# Altium PCB sband.PcbDoc (part 1 of 2)
Units mil, origin at the board's own origin, x right, y up, seen from the top; angles counter-clockwise.
Board outline 1830 x 2835 mil, 4 copper layers (Top Layer, Int1 (GND), Int2 (PWR), Bottom Layer), stack 53.912 mil thick; 48 components, 82 nets, 253 pads, 143 vias.
Unrouted connection lines stored in the file: 6.
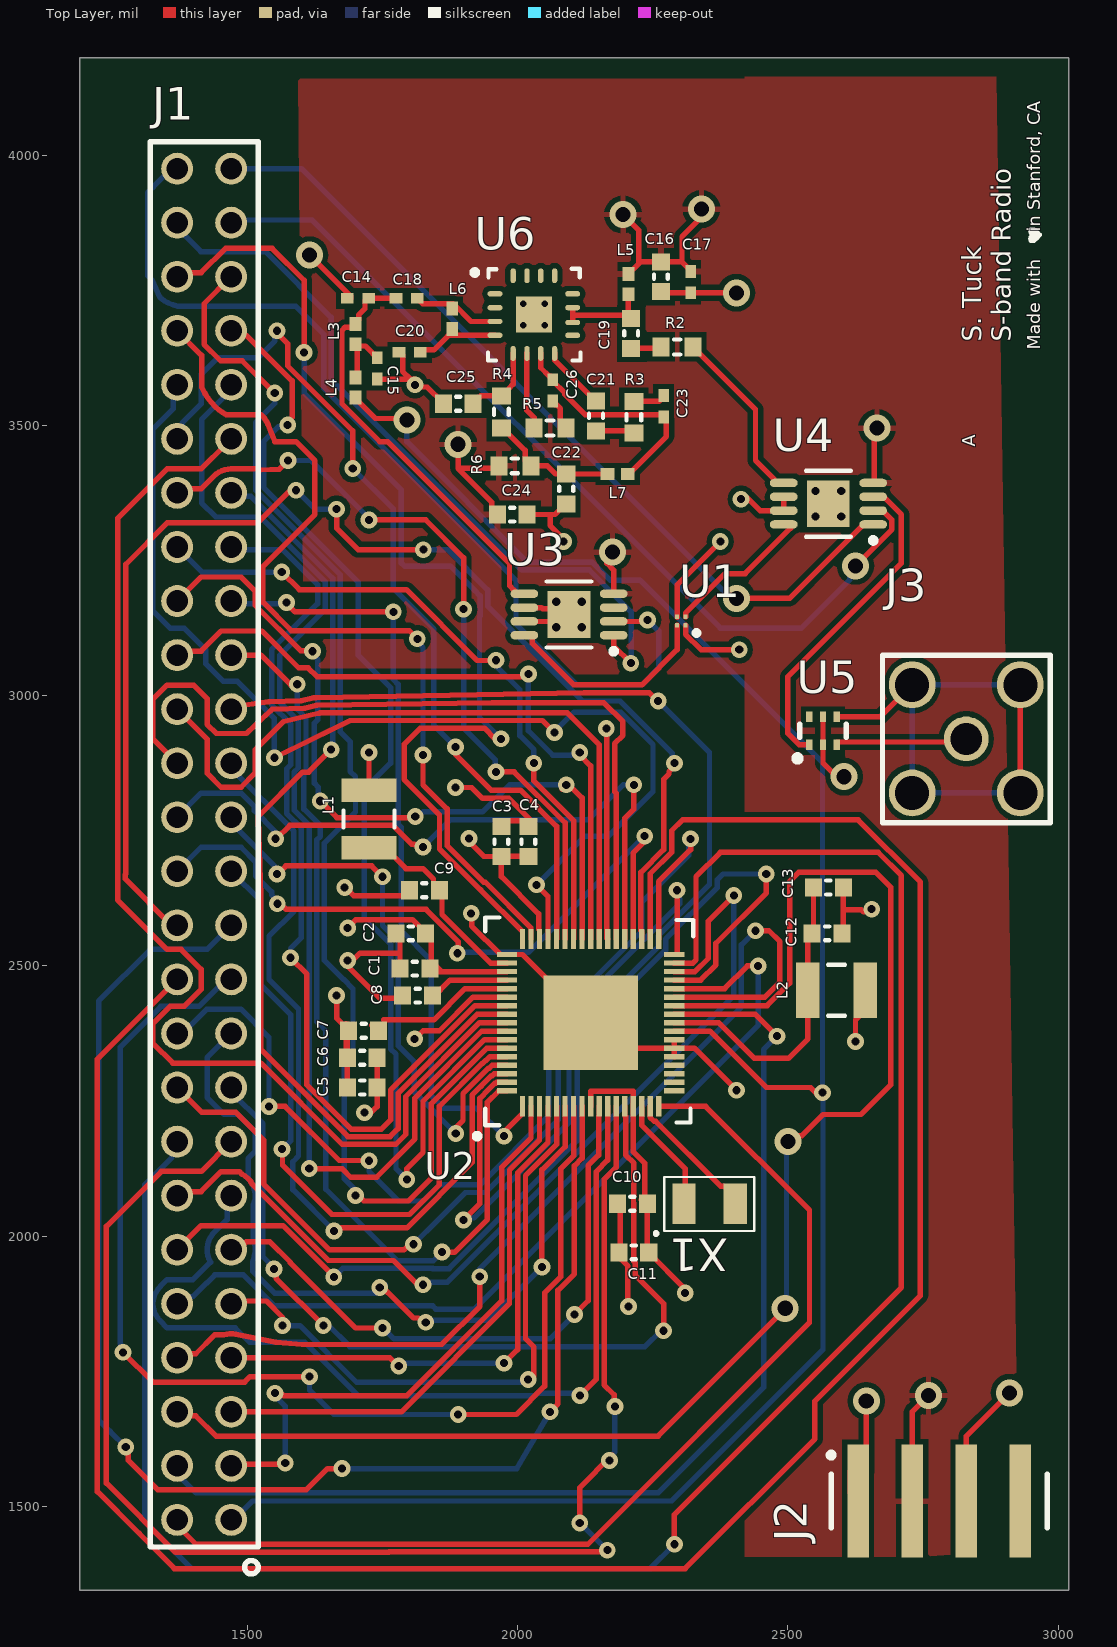
[diagram p0: Top Layer view]
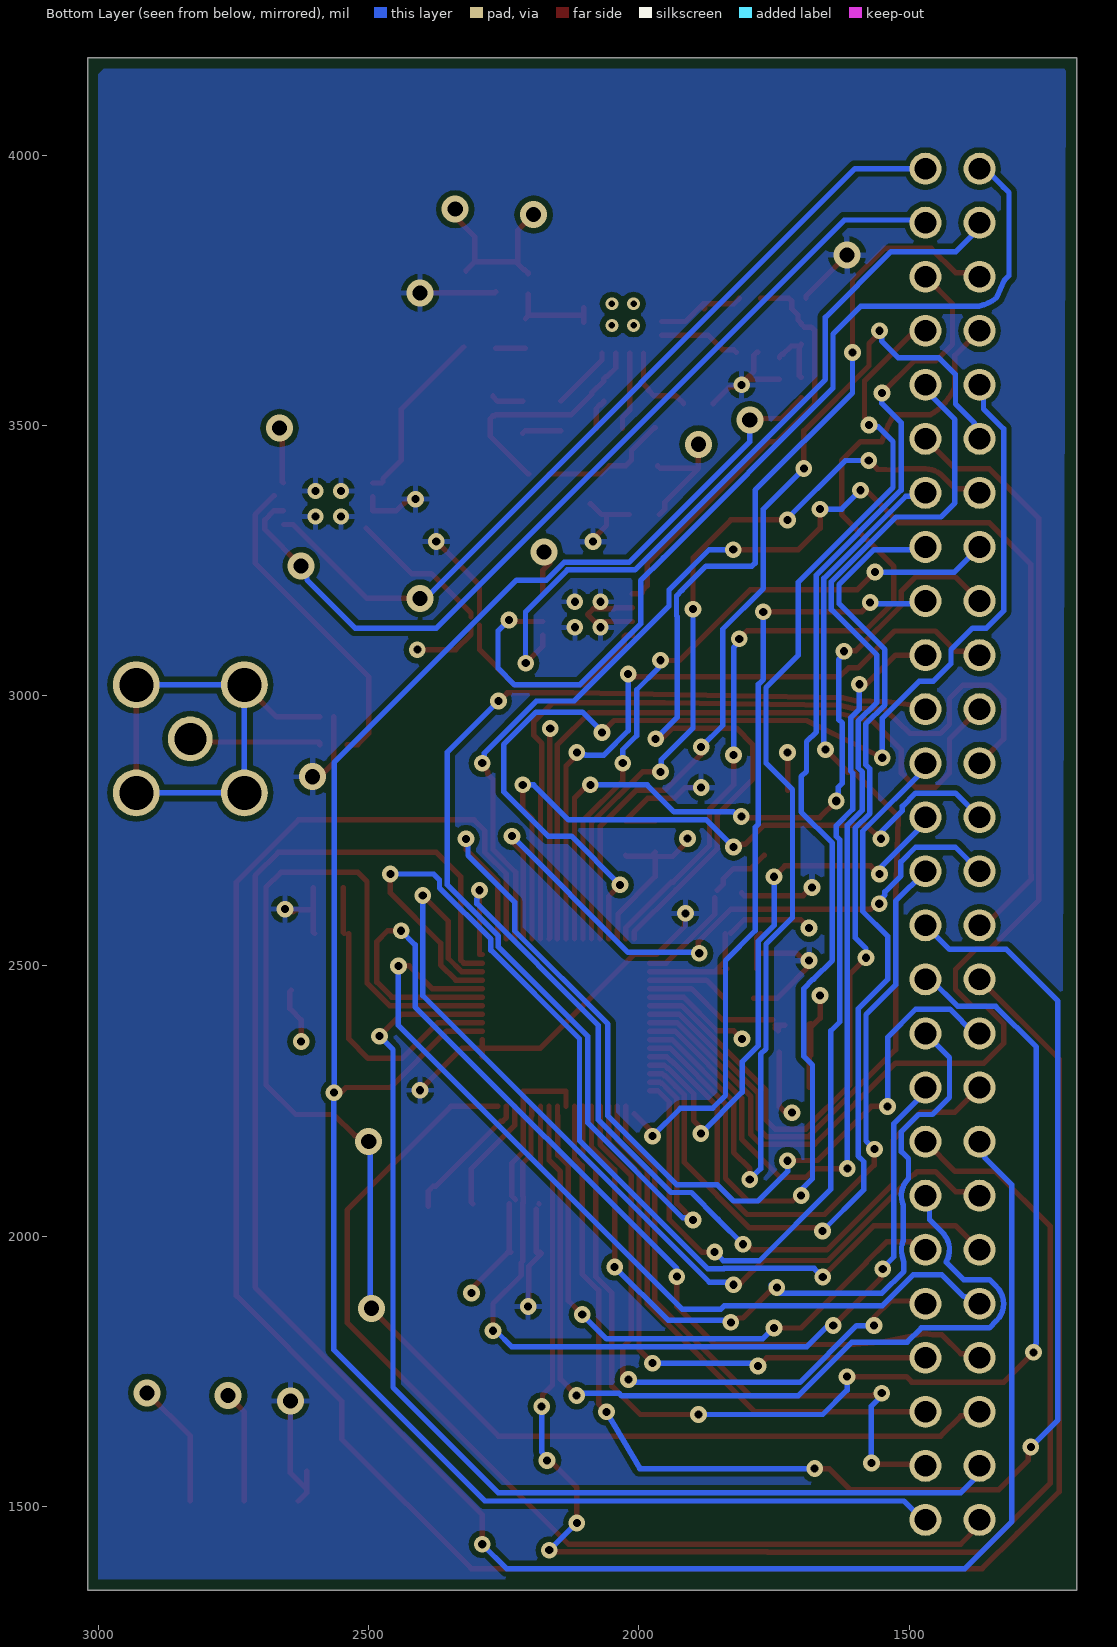
[diagram p1: Bottom Layer view, seen from below]
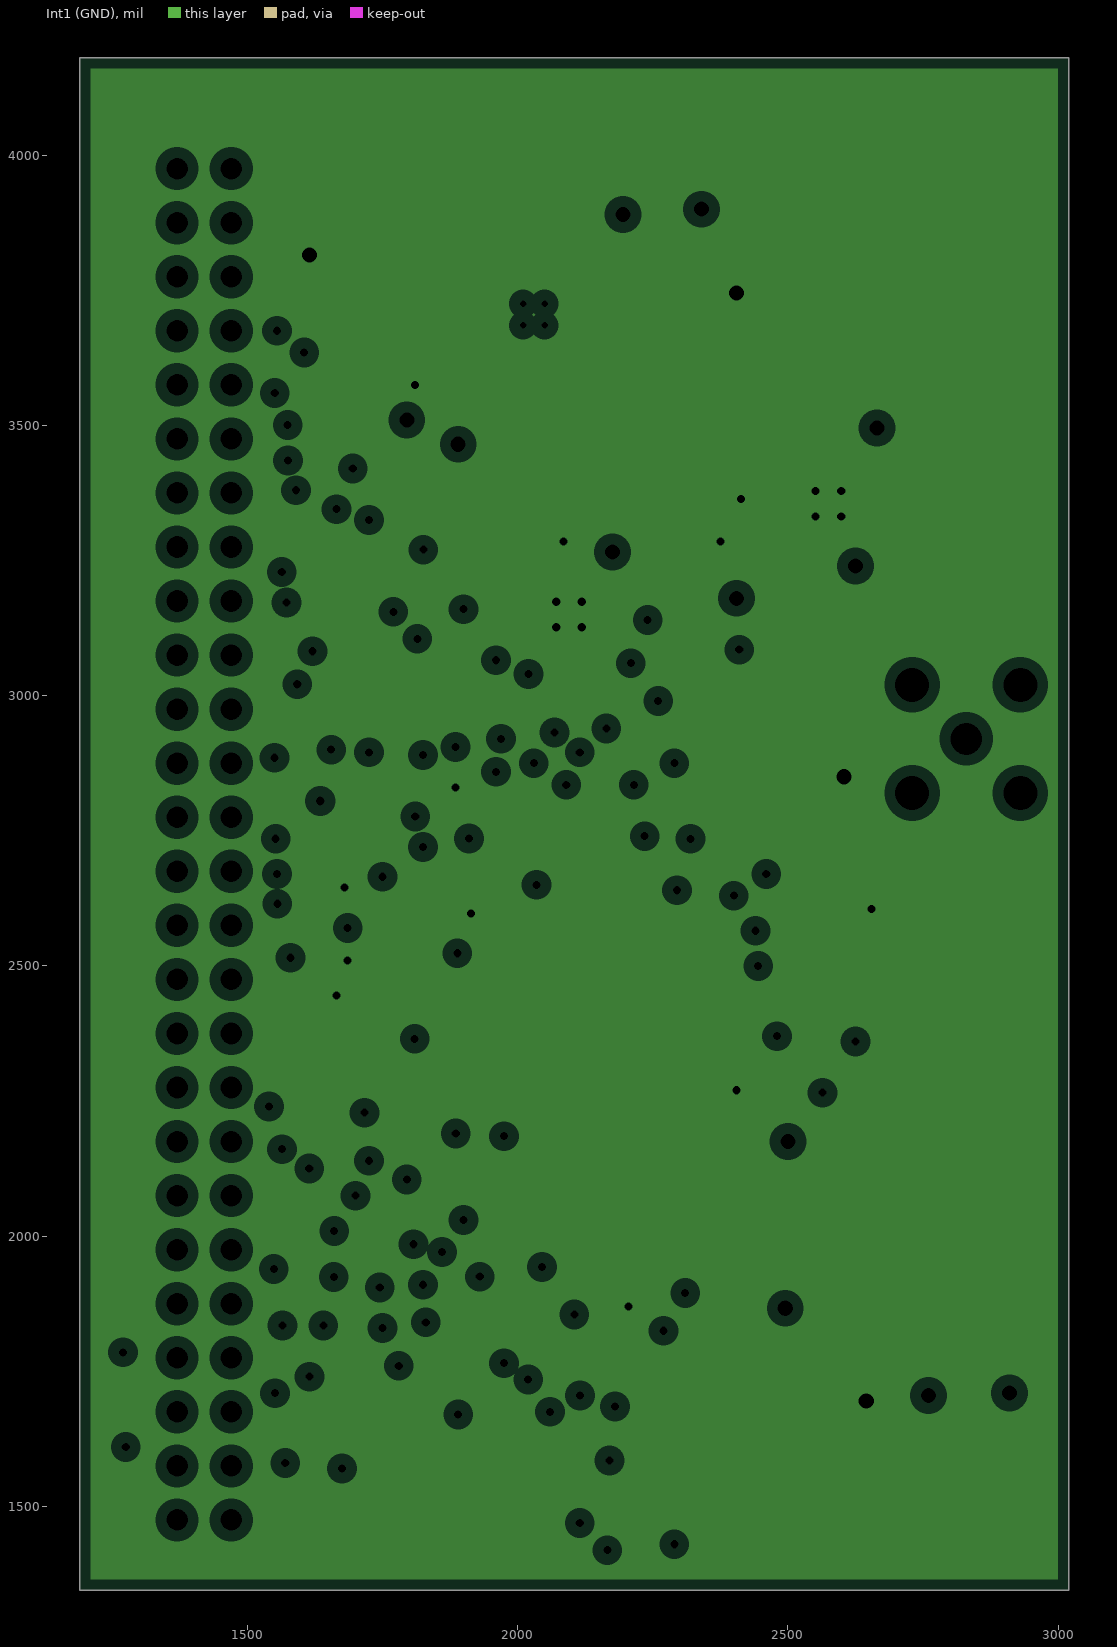
[diagram p2: Int1 (GND), clearances drawn from the general rule]
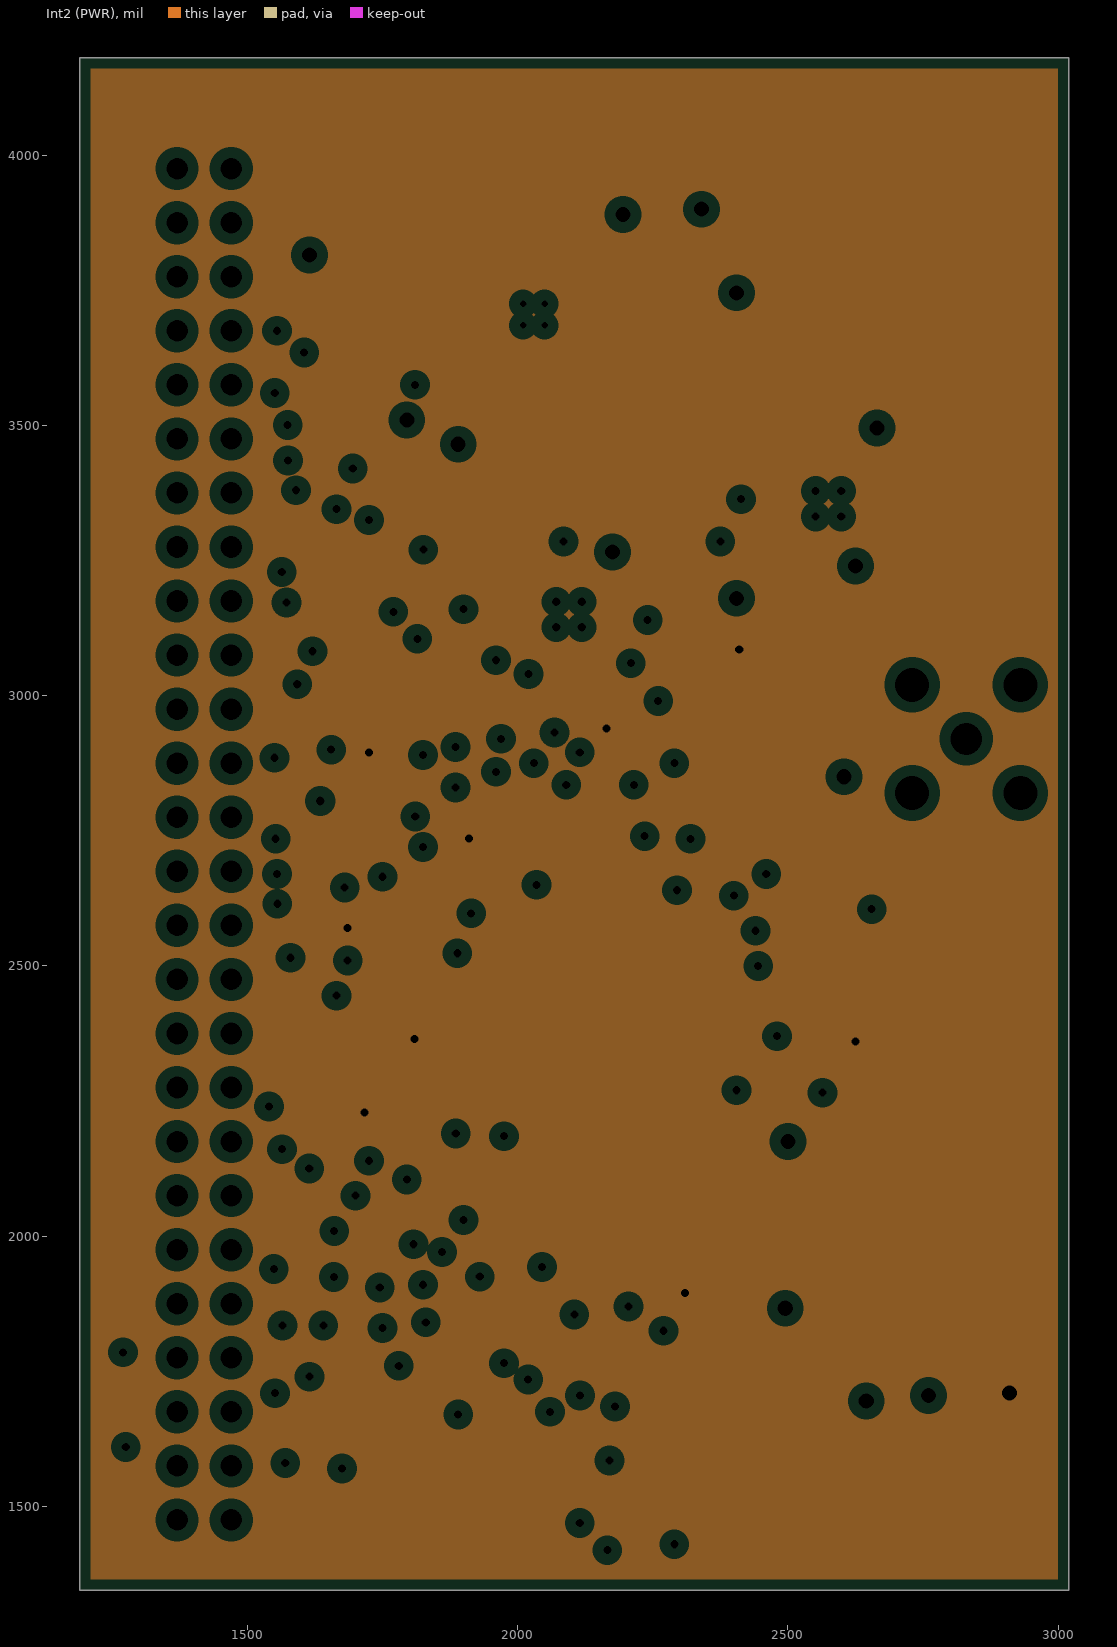
[diagram p3: Int2 (PWR), clearances drawn from the general rule]
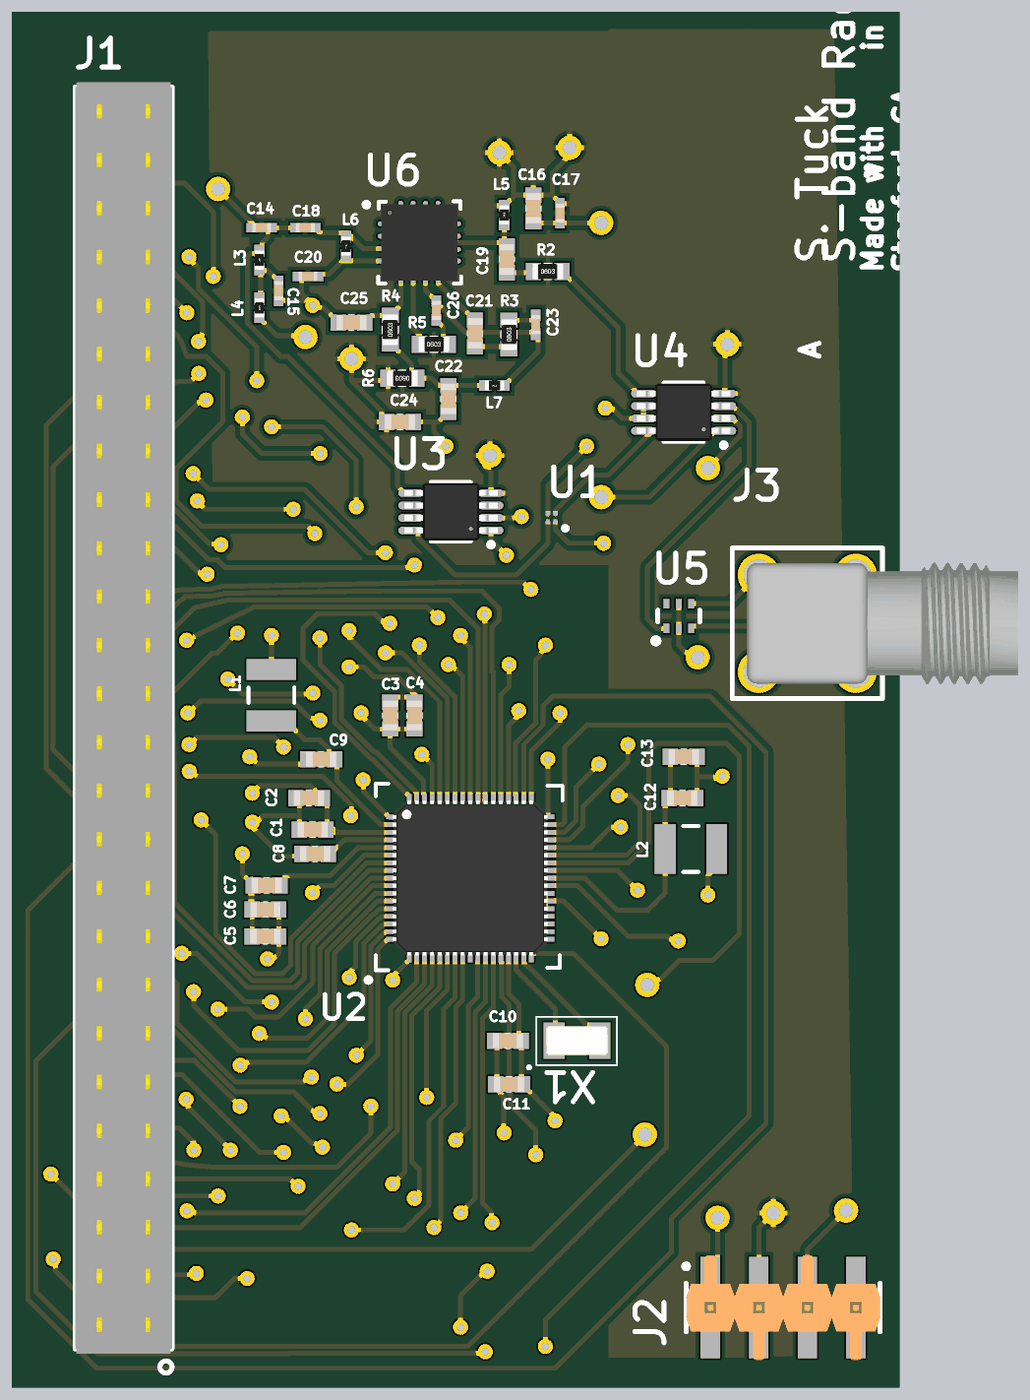
[diagram p4: 3D render of the assembled board from above, using the file's embedded part models]

## Layer stack, top to bottom
Top Solder: solder mask 1, SM-001, Dk 4
Top Layer: signal copper 1.378
Dielectric 1: prepreg 5.1, PP-017, Dk 4.3
Dielectric 2: prepreg 5.1, PP-017, Dk 4.3
Int1 (GND): plane copper 1.378, net GND
Dielectric 3: core 28, Core-039, Dk 4.8
Int2 (PWR): plane copper 1.378, net IOVDD
Dielectric 4: prepreg 5.1, PP-017, Dk 4.3
Dielectric 5: prepreg 5.1, PP-017, Dk 4.3
Bottom Layer: signal copper 1.378
Bottom Solder: solder mask 1, SM-001, Dk 4

## Board outline
1190,1345 3020,1345 3020,4180 1190,4180

## Design rules (kind name [scope] priority, off if disabled: settings)
Clearance [All] p1: gap=10 ignorepadtopadclearanceinfootprint=TRUE except(0: Arc-Hole Track-Hole SMDPad-Hole THPad-Hole Via-Hole Fill-Hole Poly-Hole Region-Hole Text-Hole; 2: Arc-Text Track-Text SMDPad-Text THPad-Text Via-Text Fill-Text Poly-Text Region-Text Text-Text; 4: Arc-Arc Arc-Track Arc-SMDPad Track-Track Track-SMDPad SMDPad-SMDPad)
PlaneClearance [All] p1: clearance=20
PlaneConnect [All] p1: planeconnectstyle=Relief reliefexpansion=20 reliefentries=4 reliefconductorwidth=10 reliefairgap=10
PolygonConnect [All] p1: connectstyle=Relief reliefconductorwidth=10 reliefentries=4 polygonreliefangle="90 Angle" airgapwidth=10
RoutingVias [All] p1: holewidth=28 width=50 viastyle="Through Hole" minholewidth=28 minwidth=50 maxholewidth=28 maxwidth=50
SolderMaskExpansion [All] p1: expansion=4 istentingtop=FALSE
Width [All] p1: maxlimit=10 minlimit=10 preferedwidth=10
28 further rules are at their usual default settings.

## Components (designator, comment, footprint, x,y, rotation, side; value= is the part's Value field where it differs from the comment)
C1 "__template_cap" C0603 1810,2495 r180 top
C2 "__template_cap" C0603 1802.44,2560 r180 top
C3 "__template_cap" C0603 1970,2730 r90 top
C4 "__template_cap" C0603 2020,2730 r90 top
C5 "__template_cap" C0603 1712.56,2275 r180 top
C6 "__template_cap" C0603 1712.44,2330 r180 top
C7 "__template_cap" C0603 1715,2380 r180 top
C8 "__template_cap" C0603 1815,2445 r180 top
C9 "__template_cap" C0603 1827.56,2640 r180 top
C10 "__template_cap" C0603 2212.44,2060 r180 top
C11 "__template_cap" C0603 2215,1970 r180 top
C12 "__template_cap" C0603 2572.44,2560 r0 top
C13 "__template_cap" C0603 2575,2645 r0 top
C14 "__template_cap" C0402 1704.68,3735 r180 top
C15 "__template_cap" C0402 1740,3605.31 r270 top
C16 "__template_cap" C0603 2265,3775 r270 top
C17 "__template_cap" C0402 2320,3765 r270 top
C18 "__template_cap" C0402 1794.69,3735 r0 top
C19 "__template_cap" C0603 2210,3670 r270 top
C20 "__template_cap" C0402 1800.31,3635 r180 top
C21 "__template_cap" C0603 2145,3517.44 r270 top
C22 "__template_cap" C0603 2090,3382.44 r270 top
C23 "__template_cap" C0402 2270,3535.32 r270 top
C24 "__template_cap" C0603 1990,3335 r0 top
C25 "__template_cap" C0603 1890,3540 r180 top
C26 "__template_cap" C0402 2065,3564.68 r270 top
J1 "CONN_SAMTEC_RCPT_52POS_PC104_1" SAMTEC_ESQ-126-39-G-D 1420,2725 r90 top
J2 "CONN_1x4_MALE_SMD" CONN_1x4_100MIL_MALE_SMD 2630,1510 r90 top
J3 "CONN_SMA_JACK_R/A_50_OHM_PCB" TE_SMA_JACK_RA_5-1814400-1 2830,2920 r90 top
L1 "INDUCTOR 47UH 420MA 1210 SMD" C1210 1725,2771.85 r270 top
L2 "INDUCTOR 47UH 420MA 1210 SMD" C1210 2590,2455 r180 top
L3 "__template_inductor" R0402 1700,3668.7 r270 top
L4 "__template_inductor" R0402 1700,3570 r270 top
L5 "__template_inductor" R0402 2205,3761.3 r90 top
L6 "__template_inductor" R0402 1879.03,3697.27 r90 top
L7 "__template_inductor" R0402 2185,3410 r0 top
R2 "__template_resistor" R0603 2295,3645 r0 top
R3 "__template_resistor" R0603 2215,3515 r90 top
R4 "__template_resistor" R0603 1970,3525 r90 top
R5 "__template_resistor" R0603 2060,3495 r0 top
R6 "__template_resistor" R0603 1995,3425 r180 top
U1 "LNA MAX2692EWS+T" 4WLP 2302.87,3137.87 r180 top
U2 "TRANSCEIVER EFR32BG12P433F1024GM68-C" 68QFN 2135,2395 r90 top
U3 "RF_SWITCH_HMC784AMS8GE" 8MSOP65E 2095,3150 r180 top
U4 "RF_SWITCH_HMC784AMS8GE" 8MSOP65E 2575,3355 r180 top
U5 "BALUN 2.4-2.5 GHz" 2450BL15B200 2565,2935 r180 top
U6 "LNA_SKY67106-306LF" 16QFN 2030,3705 r0 top
X1 "XTAL_32.768_7PF" XTAL_ECS-0.327-7-34B-TR 2355,2060 r0 top

## Footprints (in the part's own frame and the unit in brackets; to place one, negate y for a bottom-side part, rotate by r counter-clockwise, add the part's x,y. Pads: shape width x height; smd on the part's side, far side on the other; paste and mask are expansions set on the pad)
4WLP [mm]
  rect 0.2x0.2 smd mask+0.05: 1(-0.2,0.2) 2(-0.2,-0.2) 3(0.2,-0.2) 4(0.2,0.2)
  silkscreen extent -0.81,0.46 -0.61,0.66
8MSOP65E [mm] "TSOP, 8-Leads, Body 3.1x3.1mm (max), Pitch 0.65mm, IPC High Density"
  oval 1.3x0.4 smd: 1(-2.1,0.975) 2(-2.1,0.325) 3(-2.1,-0.325) 4(-2.1,-0.975) 5(2.1,-0.975) 6(2.1,-0.325) 7(2.1,0.325) 8(2.1,0.975)
  rect 2x2.2 smd: 9(0,0)
  silkscreen extent -2.23,-1.55 1.05,1.85, body extent -2.45,-1.5 2.45,1.5, height 1.15
16QFN [mm]
  oval 0.7x0.25 smd: 1(-1.825,0.975) 2(-1.825,0.325) 3(-1.825,-0.325) 4(-1.825,-0.975) 9(1.825,-0.975) 10(1.825,-0.375) 11(1.825,0.325) 12(1.825,0.975)
  oval 0.25x0.7 smd: 5(-0.975,-1.825) 6(-0.325,-1.825) 7(0.325,-1.825) 8(0.975,-1.825) 13(0.975,1.825) 14(0.325,1.825) 15(-0.325,1.825) 16(-0.975,1.825)
  rect 1.7x1.7 smd: 17(0,0)
  silkscreen extent -2.9,-2.16 2.19,2.15, body extent -2,-2 2,2, height 0.92
68QFN [mm] "QFN, 68-Leads, Body 10.00x10.00mm, Pitch 0.50mm, Thermal Pad 8.30x8.30mm, IPC Low Density"
  rect 4.445x4.445 smd: 0(0,0)
  rect 0.95x0.25 smd: 1(-3.93,3.2) 2(-3.93,2.8) 3(-3.93,2.4) 4(-3.93,2) 5(-3.93,1.6) 6(-3.93,1.2) 7(-3.93,0.8) 8(-3.93,0.4) 9(-3.93,0) 10(-3.93,-0.4) 11(-3.93,-0.8) 12(-3.93,-1.2) 13(-3.93,-1.6) 14(-3.93,-2) 15(-3.93,-2.4) 16(-3.93,-2.8) 17(-3.93,-3.2) 35(3.93,-3.2) 36(3.93,-2.8) 37(3.93,-2.4) 38(3.93,-2) 39(3.93,-1.6) 40(3.93,-1.2) 41(3.93,-0.8) 42(3.93,-0.4) 43(3.93,0) 44(3.93,0.4) 45(3.93,0.8) 46(3.93,1.2) 47(3.93,1.6) 48(3.93,2) 49(3.93,2.4) 50(3.93,2.8) 51(3.93,3.2)
  rect 0.25x0.95 smd: 18(-3.2,-3.93) 19(-2.8,-3.93) 20(-2.4,-3.93) 21(-2,-3.93) 22(-1.6,-3.93) 23(-1.2,-3.93) 24(-0.8,-3.93) 25(-0.4,-3.93) 26(0,-3.93) 27(0.4,-3.93) 28(0.8,-3.93) 29(1.2,-3.93) 30(1.6,-3.93) 31(2,-3.93) 32(2.4,-3.93) 33(2.8,-3.93) 34(3.2,-3.93) 52(3.2,3.93) 53(2.8,3.93) 54(2.4,3.93) 55(2,3.93) 56(1.6,3.93) 57(1.2,3.93) 58(0.8,3.93) 59(0.4,3.93) 60(0,3.93) 61(-0.4,3.93) 62(-0.8,3.93) 63(-1.2,3.93) 64(-1.6,3.93) 65(-2,3.93) 66(-2.4,3.93) 67(-2.8,3.93) 68(-3.2,3.93)
  silkscreen extent -5.46,-4.83 4.95,5.46, body extent -4.05,-4.05 4.05,4.05, height 0.85
2450BL15B200 [mm]
  rect 0.3x0.5 smd: 1(0.65,0.65) 2(0,0.65) 3(-0.65,0.65) 4(-0.65,-0.65) 5(0,-0.65) 6(0.65,-0.65)
  silkscreen extent -1.1,-0.3 1.3,1.4, body extent -1,-0.63 1,0.63, height 0.85
C0402 [mm] "Chip Capacitor, 2-Leads, Body 1.0x0.5mm, IPC High Density"
  rect 0.6x0.5 smd: 1(-0.5,0) 2(0.5,0)
  body extent -0.5,-0.25 0.5,0.25, height 0.5
C0603 [mm] "Chip Capacitor, 2-Leads, Body 1.6x0.8mm, IPC High Density"
  rect 0.8x0.85 smd: 1(-0.7,0) 2(0.7,0)
  silkscreen extent -0.1,-0.33 0.1,0.33, body extent -0.8,-0.4 0.8,0.4, height 0.8
C1210 [mm] "Chip Capacitor, Body 3.2x2.5mm, IPC High Density"
  rect 1.1x2.6 smd: 1(-1.35,0) 2(1.35,0)
  silkscreen extent -0.4,-1.2 0.4,1.2, body extent -1.7,-1.35 1.7,1.35, height 1.3
CONN_1x4_100MIL_MALE_SMD [mil]
  rect 209x40 smd: 1(0,0) 2(0,-100) 3(0,-200) 4(0,-300)
  silkscreen extent -50,-350 90,55, body extent -108,-350 108,50, height 421
R0402 [mm] "Chip Resistor, 2-Leads, Body 1.0x0.5mm, IPC High Density"
  rect 0.65x0.55 smd: 1(-0.475,0) 2(0.475,0)
  body extent -0.5,-0.25 0.5,0.25, height 0.35
R0603 [mm] "Chip Resistor, 2-Leads, Body 1.6x0.8mm, IPC High Density"
  rect 0.8x0.9 smd: 1(-0.75,0) 2(0.75,0)
  silkscreen extent -0.15,-0.35 0.15,0.35, body extent -0.8,-0.4 0.8,0.4, height 0.45
SAMTEC_ESQ-126-39-G-D [mil]
  round 59 hole 40 paste+0: 1(-1250,-50) 2(-1250,50) 3(-1150,-50) 4(-1150,50) 5(-1050,-50) 6(-1050,50) 7(-950,-50) 8(-950,50) 9(-850,-50) 10(-850,50) 11(-750,-50) 12(-750,50) 13(-650,-50) 14(-650,50) 15(-550,-50) 16(-550,50) 17(-450,-50) 18(-450,50) 19(-350,-50) 20(-350,50) 21(-250,-50) 22(-250,50) 23(-150,-50) 24(-150,50) 25(-50,-50) 26(-50,50) 27(50,-50) 28(50,50) 29(150,-50) 30(150,50) 31(250,-50) 32(250,50) 33(350,-50) 34(350,50) 35(450,-50) 36(450,50) 37(550,-50) 38(550,50) 39(650,-50) 40(650,50) 41(750,-50) 42(750,50) 43(850,-50) 44(850,50) 45(950,-50) 46(950,50) 47(1050,-50) 48(1050,50) 49(1150,-50) 50(1150,50) 51(1250,-50) 52(1250,50)
  silkscreen extent -1350,-100 1300,100, body extent -1310,-100 1310,100, height 440
TE_SMA_JACK_RA_5-1814400-1 [mm]
  round 2.1 hole 1.5: 1(0,0)
  round 2.2 hole 1.6: 2(-2.54,-2.54) 2(-2.54,2.54) 2(2.54,-2.54) 2(2.54,2.54)
  silkscreen extent -3.94,-3.94 3.94,3.94, body extent -3.18,-11.05 3.17,3.15, height 10.43
XTAL_ECS-0.327-7-34B-TR [mm]
  rect 1.1x1.9 smd: 1(-1.2,0) 2(1.2,0)
  silkscreen extent -2.54,-1.43 2.1,1.25, body extent -1.6,-0.75 1.6,0.75, height 0.9

## Part data
C1 C3 C5 C10 C12 C25: library part 490-1519-1-ND, "CAP CER 0603 0.1µF X7R 50V 10%", Capacitance (shorthand)=0.1µF, Capacitance - pF (Machine readable)=#NAME?, Dielectric=X7R, Manufacturer="Murata Electronics North America", Rated Voltage=50V, Supplier 1=Digikey, Supplier Part Number 1=490-1519-1-ND, Type=capacitor
C2 C4 C6 C11 C13: library part 490-13248-1-ND, "CAP CER 10UF 35V X5R 0603 20%", Capacitance (shorthand)=10µF, Capacitance - pF (Machine readable)=#NAME?, Dielectric=X5R, Manufacturer="Murata Electronics North America", Rated Voltage=35V, Supplier 1=Digikey, Supplier Part Number 1=490-13248-1-ND, Type=capacitor
C7 C8: library part 490-10731-1-ND, "CAP CER 2.2UF 16V X5R 0603 10%", Capacitance (shorthand)=2.2µF, Capacitance - pF (Machine readable)=#NAME?, Dielectric=X5R, Manufacturer="Murata Electronics North America", Rated Voltage=25V, Supplier 1=Digikey, Supplier Part Number 1=490-10731-1-ND, Type=capacitor
C9: library part 311-1785-1-ND, "CAP CER 4.7UF 16V X5R 0603 10%", Capacitance (shorthand)=4.7µF, Capacitance - pF (Machine readable)=#NAME?, Dielectric=X5R, Manufacturer=Yageo, Rated Voltage=16V, Supplier 1=Digikey, Supplier Part Number 1=311-1785-1-ND, Type=capacitor
C14: library part 490-6073-1-ND, "CAP CER 1PF 50V C0G/NP0 0402", Capacitance (shorthand)=1pF, Capacitance - pF (Machine readable)=1, Dielectric="C0G, NP0", Manufacturer="Murata Electronics North America", Rated Voltage=50V, Tolerance=±0.1pF, Supplier 1=Digikey, Supplier Part Number 1=490-6073-1-ND, Type=capacitor
C15: library part 490-8091-1-ND, "CAP CER 2PF 50V C0G/NP0 0402", Capacitance (shorthand)=2pF, Capacitance - pF (Machine readable)=2, Dielectric="C0G, NP0", Manufacturer="Murata Electronics North America", Rated Voltage=50V, Tolerance=±0.1pF, Supplier 1=Digikey, Supplier Part Number 1=490-8091-1-ND, Type=capacitor
C16 C24: library part 490-1427-1-ND, "CAP CER 100PF 50V C0G/NP0 0603", Capacitance (shorthand)=100pF, Capacitance - pF (Machine readable)=100, Dielectric="C0G, NP0", Manufacturer="Murata Electronics North America", Rated Voltage=50V, Supplier 1=Digikey, Supplier Part Number 1=490-1427-1-ND, Type=capacitor
C17 C26: library part 490-8094-1-ND, "CAP CER 2.7PF 50V C0G/NP0 0402", Capacitance (shorthand)=2.7pF, Capacitance - pF (Machine readable)=2.7, Dielectric="C0G, NP0", Manufacturer="Murata Electronics North America", Rated Voltage=50V, Tolerance=±0.1pF, Supplier 1=Digikey, Supplier Part Number 1=490-8094-1-ND, Type=capacitor
C18: library part 490-11189-1-ND, "CAP CER 10PF 50V C0G/NP0 0402", Capacitance (shorthand)=10pF, Capacitance - pF (Machine readable)=10, Dielectric="C0G, NP0", Manufacturer="Murata Electronics North America", Rated Voltage=50V, Tolerance=±1%, Supplier 1=Digikey, Supplier Part Number 1=490-11189-1-ND, Type=capacitor
C19: library part 490-1405-1-ND, "CAP CER 12PF 50V C0G/NP0 0603", Capacitance (shorthand)=12pF, Capacitance - pF (Machine readable)=12, Dielectric="C0G, NP0", Manufacturer="Murata Electronics North America", Rated Voltage=50V, Supplier 1=Digikey, Supplier Part Number 1=490-1405-1-ND, Type=capacitor
C20: library part 490-8090-1-ND, "CAP CER 20PF 50V C0G/NP0 0402", Capacitance (shorthand)=20pF, Capacitance - pF (Machine readable)=20, Dielectric="C0G, NP0", Manufacturer="Murata Electronics North America", Rated Voltage=50V, Tolerance=±2%, Supplier 1=Digikey, Supplier Part Number 1=490-8090-1-ND, Type=capacitor
C21: library part 490-1411-1-ND, "CAP CER 22PF 50V C0G/NP0 0603", Capacitance (shorthand)=22pF, Capacitance - pF (Machine readable)=22, Dielectric="C0G, NP0", Manufacturer="Murata Electronics North America", Rated Voltage=50V, Supplier 1=Digikey, Supplier Part Number 1=490-1411-1-ND, Type=capacitor
C22: library part 490-1512-1-ND, "CAP CER 0603 10000pF X7R 50V 10%", Capacitance (shorthand)=10000pF, Capacitance - pF (Machine readable)=#NAME?, Dielectric=X7R, Manufacturer="Murata Electronics North America", Rated Voltage=50V, Supplier 1=Digikey, Supplier Part Number 1=490-1512-1-ND, Type=capacitor
C23: library part 490-8099-1-ND, "CAP CER 3.9PF 50V C0G/NP0 0402", Capacitance (shorthand)=3.9pF, Capacitance - pF (Machine readable)=3.9, Dielectric="C0G, NP0", Manufacturer="Murata Electronics North America", Rated Voltage=50V, Tolerance=±0.1pF, Supplier 1=Digikey, Supplier Part Number 1=490-8099-1-ND, Type=capacitor
J1: "CONN RCPT 52POS .100\" DUAL GOLD", Current Rating="5.7A per Contact", Insulation Color=Black, Manufacturer="Samtec Inc.", Manufacturer Part Number=ESQ-126-39-G-D, Material Flammability Rating="UL94 V-0", Operating Temperature="-55°C ~ 125°C", Supplier Part Number 1=SAM10462-ND, Voltage Rating=550VAC, Applications=-, Category="Connectors, Interconnects", ComponentLink1Description=http://suddendocs.samtec.com/prints/esq-1xx-xx-x-x-xxx-xx-x-xx-mkt.pdf, ComponentLink1URL=http://suddendocs.samtec.com/prints/esq-1xx-xx-x-x-xxx-xx-x-xx-mkt.pdf, Connector Type="Elevated Socket", Contact Finish - Mating=Gold, Contact Finish - Post=Gold, Contact Finish Thickness - Mating="20µin (0.51µm)", Contact Finish Thickness - Post="3µin (0.08µm)", Contact Length - Post="0.480\" (12.19mm)", Contact Material="Phosphor Bronze", Contact Shape=Square, Contact Type=Forked, Fastening Type=Push-Pull, Features=-, Ingress Protection=-, Insulation Height="0.435\" (11.05mm)", Insulation Material="Liquid Crystal Polymer (LCP)", Mated Stacking Heights=-, Mounting Type="Through Hole", Number of Positions=52, Number of Positions Loaded=All, Number of Rows=2, Packaging=Tube, Part Status=Active, Pitch - Mating="0.100\" (2.54mm)", Pricing 1="1=9.01, 10=8.48, 25=8.2416, 50=7.685, 100=7.42, 250=6.89, 500=6.7575, 1000=6.4925, 2500=6.36 (USD)", RoHS="RoHS Compliant", Row Spacing - Mating="0.100\" (2.54mm)", Stock 1=21, Style="Board to Board", Supplier 1=Digi-Key, Termination=Solder
J2: library part CMP-029-0037-1, "CONN HEADER 4POS MALE SMD", Color=Black, Manufacturer=3M, Manufacturer Part Number=961104-6700-AR-TP, ComponentLink1Description=http://multimedia.3m.com/mws/media/548111O/3mtm-pin-strip-header-ts2183.pdf, ComponentLink1URL=http://multimedia.3m.com/mws/media/548111O/3mtm-pin-strip-header-ts2183.pdf, Connector Type="Header, Unshrouded", Contact Finish=Gold, Contact Finish Thickness=Flash, Contact Mating Length="0.260\" (6.60mm)", Contact Type="Male Pin", Design Item ID=CONN_1x4_MALE_SMD, Fastening Type=-, Features=-, Mounting Type="Surface Mount", Number of Positions=4, Number of Positions Loaded=All, Number of Rows=1, Packaging=Tube, Part Status=Active, Pitch="0.100\" (2.54mm)", Pricing 1="1=0.64, 10=0.6, 25=0.54, 50=0.48, 100=0.46, 250=0.42, 500=0.4, 1000=0.33, 2500=0.3 (USD)", RoHS="RoHS Compliant", Row Spacing=-, Source=connector.SchLib, Stock 1=6022, Termination=Solder
J3: library part CMP-029-0089-1, "CONN SMA JACK R/A 50 OHM PCB", Dielectric Material="Polytetrafluoroethylene (PTFE)", Frequency - Max=3GHz, Housing Color=-, Manufacturer="TE Connectivity", Manufacturer Part Number=5-1814400-1, Body Finish=Gold, Body Material="Zinc Alloy", Cable Group=-, Center Contact Material="Beryllium Copper", Center Contact Plating=Gold, ComponentLink1Description=Datasheet, ComponentLink1URL=http://www.te.com/commerce/DocumentDelivery/DDEController?Action=srchrtrv&DocNm=1814400&DocType=Customer+Drawing&DocLang=English, Connector Style=SMA, Connector Type="Jack, Female Socket", Contact Termination=Solder, Design Item ID=CONN_SMA_JACK_R/A_50_OHM_PCB, Fastening Type=Threaded, Features=-, Impedance="50 Ohm", Ingress Protection=-, Mounting Type="Through Hole, Right Angle", Operating Temperature=-, Packaging=Bulk, Pricing 1="1=3.33, 10=3.192, 25=2.926, 50=2.793, 100=2.66, 250=2.32752, 500=2.261, 1000=1.9285, 2500=1.7955 (USD)", RoHS="RoHS Compliant", Shield Termination=Solder, Source=connector.SchLib, Stock 1=20752, Voltage Rating=-
L1 L2: library part IND_BRL3225T470K, Current=390mA, Current - Saturation=420mA, DC Resistance (DCR)="1.2 Ohm Max", Frequency - Self Resonant=7MHz, Frequency - Test=100kHz, Inductance=47µH, Manufacturer="Taiyo Yuden", Manufacturer Part Number=BRL3225T470K, Operating Temperature="-40°C ~ 105°C", Package / Case="1210 (3225 Metric)", Q @ Freq=-, Supplier Part Number 1=587-2169-1-ND, Tolerance=±10%, Applications="Power Supplies", Category="Inductors, Coils, Chokes", ComponentLink1Description=Datasheet, ComponentLink1URL=http://www.yuden.co.jp/ut/product/pdf/wound07_e.pdf, Current - Temperature Rise=390mA, Material - Core=-, Mounting Type="Surface Mount", Packaging="Cut Tape (CT)", Pricing 1="1=0.16, 10=0.155, 50=0.145, 100=0.1354, 500=0.10638, 1000=0.08704 (GBP)", RoHS="RoHS Compliant", Shielding=Unshielded, Stock 1=3308, Supplier 1=Digi-Key, Type=-
L3: library part 490-14712-1-ND, "FIXED IND 3NH 1.35A 63 MOHM SMD", Current Rating=1.35A, Frequency - Self Resonant=12.5GHz, Inductance=3nH, Inductance - nH (Machine readable)=3, Manufacturer="Murata Electronics North America", Supplier 1=Digikey, Supplier Part Number 1=490-14712-1-ND, Type=inductor
L4: library part 490-15378-1-ND, "FIXED IND 2.2NH 2.53A 22 MOHM", Current Rating=2.53A, Frequency - Self Resonant=15.5GHz, Inductance=2.2nH, Inductance - nH (Machine readable)=2.2, Manufacturer="Murata Electronics North America", Supplier 1=Digikey, Supplier Part Number 1=490-15378-1-ND, Type=inductor
L5: library part 490-15373-1-ND, "FIXED IND 27NH 680MA 288 MOHM", Current Rating=680mA, Frequency - Self Resonant=4GHz, Inductance=27nH, Inductance - nH (Machine readable)=27, Manufacturer="Murata Electronics North America", Supplier 1=Digikey, Supplier Part Number 1=490-15373-1-ND, Type=inductor
L6: library part 490-16889-1-ND, "FIXED IND 5.1NH 1.77A 40 MOHM", Current Rating=1.77A, Frequency - Self Resonant=8GHz, Inductance=5.1nH, Inductance - nH (Machine readable)=5.1, Manufacturer="Murata Electronics North America", Supplier 1=Digikey, Supplier Part Number 1=490-16889-1-ND, Type=inductor
L7: library part 490-7641-1-ND, "FIXED IND 3.3NH 2A 30 MOHM SMD", Current Rating=2A, Frequency - Self Resonant=14GHz, Inductance=3.3nH, Inductance - nH (Machine readable)=3.3, Manufacturer="Murata Electronics North America", Supplier 1=Digikey, Supplier Part Number 1=490-7641-1-ND, Type=inductor
R2 R3 R6: library part 311-0.0HRCT-ND, "RES SMD 0 OHM JUMPER 1/10W 0603", Manufacturer=Yageo, Manufacturer Part Number=RC0603FR-070RL, Operating Temperature="-55°C ~ 155°C", Power (Watts)="0.1W, 1/10W", Resistance="0 Ω", Resistance (Sortable)=0, Temperature Coefficient=-, Tolerance=Jumper, Datasheets=http://www.yageo.com/documents/recent/PYu-RC_Group_51_RoHS_L_9.pdf, Image=//media.digikey.com/Renders/Yageo%20Renders/0603-(1608-Metric).jpg, Supplier 1=Digikey, Supplier Part Number 1=311-0.0HRCT-ND
R4: library part 311-2.00KHRCT-ND, "RES SMD 2K OHM 1% 1/10W 0603", Manufacturer=Yageo, Manufacturer Part Number=RC0603FR-072KL, Operating Temperature="-55°C ~ 155°C", Power (Watts)="0.1W, 1/10W", Resistance="2 kΩ", Resistance (Sortable)=2000, Temperature Coefficient=±100ppm/°C, Tolerance=±1%, Datasheets=http://www.yageo.com/documents/recent/PYu-RC_Group_51_RoHS_L_9.pdf, Image=//media.digikey.com/Renders/Yageo%20Renders/0603-(1608-Metric).jpg, Supplier 1=Digikey, Supplier Part Number 1=311-2.00KHRCT-ND
R5: library part 311-200HRCT-ND, "RES SMD 200 OHM 1% 1/10W 0603", Manufacturer=Yageo, Manufacturer Part Number=RC0603FR-07200RL, Operating Temperature="-55°C ~ 155°C", Power (Watts)="0.1W, 1/10W", Resistance="200 Ω", Resistance (Sortable)=200, Temperature Coefficient=±100ppm/°C, Tolerance=±1%, Datasheets=http://www.yageo.com/documents/recent/PYu-RC_Group_51_RoHS_L_9.pdf, Image=//media.digikey.com/Renders/Yageo%20Renders/0603-(1608-Metric).jpg, Supplier 1=Digikey, Supplier Part Number 1=311-200HRCT-ND
U5: library part BALUN_2450BL15B200E, Case Code (Imperial)=0805, Case Code (Metric)=2012, Frequency=2.45GHz, Manufacturer=Johanson, Manufacturer Part Number=2450BL15B200E, Max Frequency=2.5GHz, Max Operating Temperature=85°C, Min Operating Temperature=-40°C, Package Quantity=4000, Supplier Part Number 1=712-1043-1-ND, Case/Package=0805, ComponentLink1Description=https://www.johansontechnology.com/datasheets/baluns/2450FM07A0029.pdf, ComponentLink1URL=https://www.johansontechnology.com/datasheets/baluns/2450FM07A0029.pdf, ComponentLink2Description=https://datasheet.ciiva.com/1428/87148-1428640.pdf, ComponentLink2URL=https://datasheet.ciiva.com/1428/87148-1428640.pdf, ComponentLink3Description=https://datasheet.ciiva.com/24025/balun-2450bl15b200-242390-24025840.pdf, ComponentLink3URL=https://datasheet.ciiva.com/24025/balun-2450bl15b200-242390-24025840.pdf, ComponentLink4Description=https://datasheet.ciiva.com/1376/87148-1376071.pdf, ComponentLink4URL=https://datasheet.ciiva.com/1376/87148-1376071.pdf, ComponentLink5Description=https://datasheet.ciiva.com/2788/jti-balun-2450bl15b200-12-03-2788727.pdf, ComponentLink5URL=https://datasheet.ciiva.com/2788/jti-balun-2450bl15b200-12-03-2788727.pdf, ComponentLink6Description=https://datasheet.ciiva.com/2788/jti-balun-2450bl15b200-12-03-2788728.pdf, ComponentLink6URL=https://datasheet.ciiva.com/2788/jti-balun-2450bl15b200-12-03-2788728.pdf, ComponentLink7Description=https://datasheet.ciiva.com/2788/jti-balun-2450bl15b200-12-03-2788729.pdf, ComponentLink7URL=https://datasheet.ciiva.com/2788/jti-balun-2450bl15b200-12-03-2788729.pdf, Composition=Ceramic, Impedance=200R, Insertion Loss=1dB, Mount="Surface Mount", Packaging="Tape and Reel", Pricing 1="1=0.36, 10=0.356, 25=0.238, 50=0.212, 100=0.1942, 250=0.1742, 500=0.1706, 1000=0.1234 (USD)", REACH SVHC="No SVHC", Return Loss=9.5dB, Stock 1=184167, Supplier 1=Digi-Key, Termination=SMD/SMT
U6: "TWO-STAGE LNA"
X1: "CRYSTAL 32.7680KHZ 7PF SMD", Case/Package=SMD/SMT, ESR (Equivalent Series Resistance)=70kR, Frequency=32.768kHz, Frequency Tolerance=20ppm, Load Capacitance=7pF, Manufacturer="ECS International", Manufacturer Part Number=ECS-.327-7-34B-TR, Max Operating Temperature=85°C, Min Operating Temperature=-40°C, Package Quantity=1, Supplier Part Number 1=XC1656DKR-ND, ComponentLink1Description=http://www.ecsxtal.com/store/pdf/partnumber4.pdf, ComponentLink1URL=http://www.ecsxtal.com/store/pdf/partnumber4.pdf, Height=0.035inch, Lead Free="Lead Free", Length=0.126inch, Mount="Surface Mount", Number of Pins=2, Packaging="Tape and Reel", Pricing 1="1=0.69, 10=0.578, 50=0.5198, 100=0.462, 500=0.4389, 1000=0.3696 (USD)", Stock 1=164631, Supplier 1=Digi-Key, Termination=SMD/SMT, Tolerance=20ppm, Width=0.059inch

## Via types
v1: diameter 31, hole 15, Top Layer to Bottom Layer, 114 vias
v2: diameter 50, hole 28, Top Layer to Bottom Layer, 16 vias
v3: diameter 30, hole 15.04, Top Layer to Bottom Layer, 8 vias
v4: diameter 24, hole 12, Top Layer to Bottom Layer, 4 vias
v5: diameter 31, hole 16, Top Layer to Bottom Layer, 1 vias

## Nets (pads, with @x,y where several pads share a name; then routed paths per layer and width w, separated by ;. In a path a pad name is that pad's centre, name@x,y a point inside that pad or via, vN(x,y) a via of type N, cw(c..) or ccw(c..) an arc to the next point about the centre after c; other vN are vias at no path point)
2G4RF_I0P: J1.1 L4.2 U2.25 | length 3802.8
  Top Layer w10: L4.2 1700,3549.33 1736.68,3512.65 1792.35,3512.65 v2(1795,3510) ; U2.25 2355.75,2379.25 2460,2275 2542.18,2275 2553.18,2264 2562.5,2264 v1(2564,2265.5)
  Bottom Layer w10: J1.1 1474.65,1475 1509.65,1510 2285,1510 2565,1790 2565,2263 2564,2264 2564,2876 2226.38,3213.62 2171.18,3213.62 2138.3,3246.5 2018.5,3246.5 1795,3470 v2(1795,3510)
+5V: C16.1 C17.1 C24.1 J2.2 L5.2 R6.2 U3.4 U4.4 | length 950.9
  Top Layer w10: 1890,3420.27 1952.01,3358.26 1952.01,3345.43 C24.1 ; v2(1890,3465) 1890,3420.71 1961.18,3420.71 R6.2 ; v2(2175.68,3265.68) 2165,3255 2165,3245 2177.68,3232.32 U3.4 ; v2(2195,3890) 2224.37,3860.63 2224.37,3799.37 ; L5.2 2205,3781.97 2210.83,3787.8 2212.8,3787.8 2224.37,3799.37 ; C17.1 2320,3786.65 2304.09,3802.56 ; v2@2335,3880 2304.09,3849.09 2304.09,3802.56 ; U4.4 2660,3395.71 v2@2660,3485 ; J2.2 2730,1675 v2(2760,1705) ; 2224.37,3799.37 2227.56,3802.56 C16.1 2304.09,3802.56
  other v2: 2665,3495 2340,3900
ANT: U4.3 U5.1 | length 589.4
  Top Layer w10: U5.1 2520.59,2909.41 2500,2930 2500,3035 2710,3245 2710,3335 U4.3@2675,3370
GND: C1.2 C2.2 C3.2 C4.2 C5.2 C6.2 C7.2 C8.2 C9.2 C10.2 C11.2 C12.2 C13.2 C14.2 C15.2 C16.2 C17.2 C20.2 C22.2 C24.2 C25.2 J2.1 U1.3 U2.0 U2.22 U2.23 U2.24 U2.52 U3.6 U3.7 U3.9 U4.6 U4.7 U4.9 U5.2 U5.5 | length 3358.5
  Top Layer w10: v2(1615,3815) 1690.98,3739.02 C14.2@1690.98,3735 ; v1(1665,2445) 1665,2403.42 1680.8,2387.63 C7.2@1682.44,2387.63 ; v1(1680,2645) 1681.36,2645 1696.36,2630 1805,2630 C9.2@1810,2635 ; C6.2@1682.44,2335 C7.2@1682.44,2387.63 ; C7.2@1682.44,2392.63 C7.2@1682.44,2387.63 ; C5.2 C6.2@1685,2335 ; C6.2@1685,2340 C7.2@1685,2392.56 ; C15.2 v1@1801.79,3585.63 ; C2.2 1782.44,2552.44 1782.44,2523.72 ; C20.2 1782.6,3635 1787.44,3630.16 1787.44,3599.98 v1@1801.79,3585.63 ; C1.2 1782.44,2523.72 ; C8.2@1787.44,2440 1745,2440 1675,2510 v1(1685.5,2510) 1695,2510 1708.72,2523.72 1782.44,2523.72 ; v1@1810,3585.63 v1@1801.79,3585.63 ; C25.2 1862.44,3540.98 1832.44,3570.98 1814.02,3570.98 v1(1810,3575) 1810,3577.42 v1@1801.79,3585.63 ; v1(1885,2830) 1915,2830 1935,2810 1984.02,2810 C4.2@2023.81,2770.21 ; v1(1914.03,2597.25) 1915,2596.27 1915,2573.87 1967.88,2520.98 U2.52 2009.02,2520.98 U2.0 2182.24,2347.76 U2.23 ; C3.2@1970,2768.15 C4.2@2025,2768.15 ; U3.7 2082.2,3137.2 U3.9 2084.61,3160.39 2046.49,3160.39 2044.08,3162.8 U3.6 ; C24.2 2060,3335 ; v1(2085,3285) 2085,3290 2060,3315 2060,3335 ; C22.2 2089.02,3354.88 2069.13,3335 2060,3335 ; C11.2@2182.44,1970 2180.5,1968.06 2203.81,1944.75 2203.81,1871.19 v1(2205,1870) ; C10.2 C10.2@2185,2059.88 ; C11.2@2190,1970 C10.2@2190,2050 ; C16.2 2267.13,3745.32 C17.2 2404.68,3745.32 v2@2405,3745 ; U2.22 U2.23 ; U2.24 U2.23 ; U1.3@2295,3145 U1.3 2295,3205 v1(2375,3285) ; v1(2405,2270) 2327.24,2347.76 U2.23 ; v1(2413.43,3363.43) 2415,3365 2425.82,3365 2448.62,3342.2 U4.7 U4.6 ; U5.5 U5.2 2565,2875 2590,2850 v2@2620,2850 ; C12.2 2602.56,2562.56 2602.56,2603.78 ; C13.2 2602.56,2603.78 ; J2.1@2615,1565.5 J2.1@2615,1532.23 ; J2.1 2615,1525 J2.1@2615,1532.23 ; 2640,2600 2636.22,2603.78 2602.56,2603.78 ; v2(2645,1695) 2645,1562.23 J2.1@2615,1532.23
  other v1: 2655,2605
  other v2: 2604,2849.98 2404.84,3745.16
  other v3: 2071.38,3126.38 2118.62,3126.38 2071.38,3173.62 2118.62,3173.62 2551.38,3331.38 2598.62,3331.38 2551.38,3378.62 2598.62,3378.62
IOVDD: C1.1 C2.1 C3.1 C4.1 C5.1 C6.1 C10.1 C11.1 J2.3 L1.1 L2.1 U1.1 U2.9 U2.14 U2.41 U2.49 U2.54 U2.57 | length 2594.8
  Top Layer w10: v1(1685.5,2570) 1685.5,2570.5 1700.73,2585.73 1805.25,2585.73 1830,2560.98 C2.1 ; v1(1716.72,2228.5) 1718.72,2226.5 1727,2226.5 1740.12,2239.62 C5.1 C6.1@1740.12,2340 ; L1.1 v1(1725,2895) ; v1(1809.5,2365) 1810,2365 1825,2380 1855.2,2380 1917.45,2442.24 U2.57 ; C1.1 1843.07,2489.49 1860,2489 ; C2.1@1840.12,2560 1840.12,2508.88 1859.51,2489.49 ; v1(1910,2735.5) 1910,2730 1937.56,2702.44 C3.1 1970,2665 2038.76,2596.24 2038.76,2568.13 2040.43,2566.47 2040.43,2549.8 U2.49 ; C3.1@1970,2709.88 1977.32,2702.56 2022.68,2702.56 C4.1@2025,2704.88 ; U2.54@1980.28,2489 1860,2489 ; U2.54 1859.51,2489.49 ; U2.9 2135,2268 2213.74,2268 U2.14 2213.74,2156.26 2235,2135 C10.1@2235,2075.98 ; v1(2164.07,2939.07) 2165,2938.13 2165,2551.22 U2.41 ; C10.1@2228.44,2067.54 C10.1@2235.37,2074.47 ; C11.1@2237.56,1970 2238.78,1971.22 ccw(c2235.83,1974.17) 2240,1974.17 C10.1 ; C11.1 2310,1902.56 v1(2310,1895) ; U1.1 2310.75,3113.5 2339.25,3085 v1(2410,3085) ; v1(2625,2360) 2625,2400 2645.83,2420.83 2645.83,2452.32 L2.1 ; J2.3 2830,1630 v2(2910,1710) ; 1859.51,2489.49 1860,2489
LNA_IN: U1.2 U4.8 | length 266.2
  Top Layer w10: U1.2 2310.75,3152.5 2384,3225.74 2420.74,3225.74 U4.8@2505,3310
LNAOUT: U1.4 U3.8 | length 399.8
  Top Layer w10: U3.8 2024.7,3111.61 2027.35,3108.96 2027.35,3096.58 2103.94,3020 2230,3020 2295,3085 U1.4
NetC7_1: C7.1 U2.56 | length 282.6
  Top Layer w10: C7.1@1730,2390 1741.28,2390 C7.1@1747.56,2390 ; C7.1@1741.28,2385 1747.56,2385 C7.1 ; 1752.56,2400 1845,2400 1902.99,2457.99 U2.56
NetC8_1: C8.1 U2.55 | length 152.3
  Top Layer w10: C8.1@1842.56,2440 1842.56,2440.98 1875.32,2473.74 U2.55
NetC9_1: C9.1 L1.2 U2.53 | length 308.4
  Top Layer w10: L1.2@1768.23,2705 1793.23,2680 1825,2680 1844.37,2660.63 1844.37,2650.75 C9.1 ; C9.1@1860,2626.38 1860,2595.01 1949.77,2505.24 U2.53
NetC12_1: C12.1 C13.1 L2.2 U2.26 | length 570.5
  Top Layer w10: U2.26 2372,2395 2438,2329 2501,2329 2536.85,2364.85 L2.2 C12.1@2536.85,2560 ; C12.1 2547.44,2562.56 C13.1
NetC15_1: C15.1 L3.2 L4.1 | length 114.9
  Top Layer w10: L4.1 1703.18,3591.88 1703.18,3643.64 L3.2 1703.18,3646.82 1718.18,3646.82 1733.19,3631.81 1735.16,3631.81 1740,3626.97 C15.1
NetC18_2: C18.2 L6.2 U6.3 | length 162.4
  Top Layer w10: C18.2 1824.37,3725 1881.23,3725 1914.03,3692.2 U6.3 ; L6.2@1878.38,3716.62 L6.2
NetC19_1: C19.1 L5.1 U6.10 U6.11 | length 178.4
  Top Layer w10: U6.10 2101.85,3704.02 ; U6.11 2101.85,3704.02 ; L5.1 C19.1@2205,3702.56 ; C19.1 C19.1@2205,3702.56 ; 2101.85,3704.02 2203.54,3704.02 C19.1@2205,3702.56
NetC19_2: C19.2 R2.1 | length 55.5
  Top Layer w10: C19.2 R2.1@2265.47,3642.44
NetC20_1: C20.1 L6.1 U6.4 | length 151.2
  Top Layer w10: C20.1 1824.84,3639.84 1844.91,3639.84 1871.68,3666.61 U6.4
NetC21_1: C21.1 U6.8 | length 120.5
  Top Layer w10: U6.8 2068.46,3633.07 2068.46,3620.55 2144.02,3545 C21.1
NetC21_2: C21.2 R3.1 | length 71.8
  Top Layer w10: C21.2 2210.59,3489.88 R3.1
NetC22_1: C22.1 L7.1 R4.1 R6.1 | length 242.2
  Top Layer w10: R4.1 1971.97,3495.47 2013.78,3453.66 2013.78,3435.75 R6.1 2055,3425 2070,3410 C22.1 L7.1
NetC23_1: C23.1 R3.2 | length 60.5
  Top Layer w10: R3.2 2261.5,3544.53 2270,3553.03 C23.1
NetC23_2: C23.2 C26.1 L7.2 U6.7 | length 435
  Top Layer w10: U6.7 2042.8,3606.57 2058.19,3591.18 2060.16,3591.18 2065,3586.34 C26.1 2065,3582.4 2087.42,3559.98 2087.42,3557.37 2124.79,3520 2193.34,3520 2193.56,3519.78 2236.44,3519.78 2236.66,3520 2264.3,3520 2266.86,3517.44 2270.16,3517.44 2275,3512.6 2275,3479.33 2205.67,3410 L7.2
NetC25_1: C25.1 R4.2 U6.5 | length 147.8
  Top Layer w10: C25.1 1917.56,3540.98 1928.31,3551.73 1929.29,3551.73 1932.09,3554.53 1971.97,3554.53 1982.72,3565.28 1982.72,3567.25 1991.61,3576.14 U6.5
NetC26_2: C26.2 R5.2 | length 57
  Top Layer w10: C26.2 2065,3543.03 2069.84,3538.19 2071.81,3538.19 2079.06,3530.94 R5.2@2079.06,3495
NetJ3_1: J3.1 U5.3 | length 246.1
  Top Layer w10: U5.3 2590.59,2913.35 2591.5,2914.25 2824.25,2914.25 J3.1
NetJ3_2: J3.2 U5.4 | length 964
  Top Layer w10: U5.4 2670.59,2960.59 J3.2@2730,3020 ; J3.2@2930,2820 J3.2@2930,3020
  Bottom Layer w10: J3.2@2930,2820 2730,2820 2730,3020 J3.2@2930,3020
NetR5_1: R5.1 U6.6 | length 143.6
  Top Layer w10: U6.6 2017.2,3527.8 2030.47,3514.53 R5.1
NetU2_15: U2.15 X1.1 | length 214.6
  Top Layer w10: U2.15 2229.49,2205.51 2310,2125 2310,2062.24 X1.1
NetU2_16: U2.16 X1.2 | length 249.8
  Top Layer w10: U2.16 2245.24,2219.67 2252.33,2212.58 2255.42,2212.58 2375.59,2092.4 2380.59,2092.4 2389.49,2083.5 X1.2@2389.49,2055
PA0: J1.20 U2.35 | length 1835.7
  Top Layer w10: v1(1540,2240) 1570,2240 1670,2140 1724.5,2140 v1(1725,2139.5) ; U2.35 2260.98,2655.98 2320,2715 v1(2320,2735)
  Bottom Layer w10: J1.20 1380,2375 1425,2420 1487.93,2420 1540,2367.93 v1(1540,2240) ; v1(1725,2139.5) 1725,2120 1780,2065 1825,2065 1855,2095 1930,2095 2057.5,2222.5 2057.5,2392.5 2230,2565 2230,2618.13 2316.37,2704.5 2316.37,2731.37 v1(2320,2735)
PA1: J1.22 U2.36 | length 4338
  Top Layer w10: J1.22 1222.5,2327.5 1222.5,1527.5 1300,1450 1365,1385 2310,1385 2550,1625 2550,1695 2745,1890 2745,2655 2630,2770 2305,2770 2285,2750 2285,2710.2 2245.24,2670.44 U2.36
PA2: J1.24 U2.37 | length 2393.1
  Top Layer w10: J1.24 1360,2575 1274.14,2660.86 1274.14,2669.14 1275,2670 1275,3242.93 1352.07,3320 1520,3320 1580,3380 v1(1590,3380) ; v1(1665,3345) 1665,3310 1705,3270 v1(1825.5,3270) ; U2.37 2229.49,2564 2228,2565.49 2228,2673 2270,2715 2270,2845 2280,2855 2280,2859.32 2290,2869.32 v1(2290,2875)
  Bottom Layer w10: v1(1590,3380) 1625,3345 v1(1665,3345) ; v1(1825.5,3270) 1870,3270 1944.5,3195.5 1944.5,3165.5 2120,2990 2189.8,2990 2285.98,2893.82 2285.98,2879.02 v1(2290,2875)
PA3: J1.26 U2.38 | length 1290.3
  Top Layer w10: v1(1555.5,2615.04) 1561.18,2615.04 1569.84,2606.38 1569.98,2606.38 1571.86,2604.5 1830.71,2604.5 1890,2545.21 1890,2525 v1(1888.44,2523.44) ; U2.38 2213.74,2708.74 2235,2730 v1(2235,2740)
  Bottom Layer w10: J1.26 1414.5,2719.5 1488.43,2719.5 1515.4,2692.53 1515.4,2666.47 1545,2636.87 1545,2631.22 1555.5,2620.72 v1(1555.5,2615.04) ; v1(1888.44,2523.44) 1890,2525 2020,2525 v1(2235,2740)
PA4: J1.28 U2.39 | length 1277
  Top Layer w10: v1(1552.37,2735.26) 1553.99,2735.26 1578.73,2760 1769.26,2760 1804.26,2725 1808.64,2725 1809.62,2724.02 1820.98,2724.02 v1(1825,2720) ; U2.39 2197.99,2772.99 2215,2790 v1(2215,2835)
  Bottom Layer w10: J1.28 1414.5,2819.5 1470,2819.5 1488.43,2819.5 1512.79,2795.14 1512.79,2787.21 1552.01,2747.99 1552.01,2735.63 v1(1552.37,2735.26) ; v1(1825,2720) 1875,2770 2130,2770 2195,2835 v1(2215,2835)
PA5: J1.30 U2.40 | length 1524
  Top Layer w10: J1.30 1325.5,2919.5 1325.5,2993.43 1351.57,3019.5 1400.5,3019.5 1425.5,2994.5 1425.5,2947 1442.5,2930 1498.3,2930 1543.15,2972.28 1546.04,2975 1605.84,2976.62 1628.63,2982 1953.33,2986.62 2159.64,2986.62 2194.57,2951.7 2194.57,2926.43 2179.5,2911.37 2179.5,2822.37 2182.24,2819.62 U2.40
PA_IN: C14.1 C18.1 L3.1 U3.5 | length 784.4
  Top Layer w10: C18.1 1722.4,3735 1717.56,3730.16 1717.56,3715.88 1705.83,3704.14 1705.83,3695.2 1700,3689.37 1700,3687.53 1694.17,3681.71 1680.86,3681.71 1675,3675.85 1675,3539.95 1744.95,3470 1759.53,3470 1985,3244.53 1985,3203.33 1993.51,3194.82 1993.51,3191.04 1996.16,3188.39 U3.5
PAOUT: R2.2 U4.5 | length 330.6
  Top Layer w10: R2.2 2440,3529.53 2440,3435 2473.51,3401.49 2473.51,3396.04 2476.16,3393.39 U4.5
PB7: J1.32 U2.42 | length 1338.8
  Top Layer w10: J1.32 1425.5,2919.5 1425.5,2856.57 1451.57,2830.5 1488.43,2830.5 1514.5,2856.57 1514.5,2899.5 1567.1,2952.1 1633.3,2967.73 1634.43,2968 2092,2968 2148.07,2911.93 2151,2909 2151,2900.72 2150.83,2566.47 2150.83,2549.8 U2.42
PB8: J1.34 U2.43 | length 1279.8
  Top Layer w10: J1.34 1377.43,3082.43 1414.5,3082.43 1451.57,3119.5 1527.07,3119.5 1595.08,3051.5 1612.45,3051.5 1628.94,3035 2015,3035 v1(2020,3040) ; v1(2115,2895) 2115,2890 2135,2870 U2.43
  Bottom Layer w10: v1(2020,3040) 2020,2935 2065,2890 2098.64,2890 2099.62,2890.98 2110.98,2890.98 v1(2115,2895)
PB9: J1.36 U2.44 | length 1438.1
  Top Layer w10: J1.36 1414.5,3219.5 1488.43,3219.5 1514.5,3193.43 1514.5,3167.18 1598.62,3083.06 1619.62,3083.06 v1(1620.68,3082) ; v5(1635,2805) 1665.65,2774.35 1808.72,2774.35 v1(1810.59,2776.21) ; v1(2090,2835) 2095,2835 2119.25,2810.75 U2.44
  Bottom Layer w10: J1.36@1360,3160 J1.36@1360,3175 ; v1(1620.68,3082) 1620.68,3076.31 1630.5,3066.5 1630.5,2955.73 1623.81,2949.03 1623.81,2838.06 1630.98,2830.88 1630.98,2809.02 v5(1635,2805) ; v1(1810.59,2776.21) 1816.27,2776.21 1825.06,2785 1935,2785 1985,2835 v1(2090,2835)
PB10: J1.38 U2.45 | length 1252.4
  Top Layer w10: v1(1563.53,3228.53) 1596.09,3195.98 1794.02,3195.98 1925,3065 1959.5,3065 v1(1960,3065.5) ; v1(2030,2875) 2030,2842.37 2103.5,2768.86 U2.45
  Bottom Layer w10: J1.38 1416.47,3228.53 v1(1563.53,3228.53) ; v1(1960,3065.5) 1964.02,3061.48 1964.02,3050.98 2004.14,3010.86 2004.14,2925.86 2030,2900 v1(2030,2875)
PB11: J1.40 U2.46 | length 1433.2
  Top Layer w10: J1.40 1377.43,3382.43 1414.5,3382.43 1442.07,3410 1442.52,3410 cw(c1470,3375) 1470,3419.5 1517.55,3419.5 1519.69,3417.37 1523.98,3417.37 1559.16,3419.16 v1(1575,3435) ; v1(1725,3325) 1830,3325 1900,3255 v1(1900,3160) ; v1(1960,2859) 1993.57,2859 2087.76,2764.81 U2.46
  Bottom Layer w10: v1(1575,3435) 1618.13,3435 1725,3328.13 v1(1725,3325) ; v1(1900,3160) 1900,2940 1958.93,2881.07 1958.93,2860.07 v1(1960,2859)
PB12: J1.42 U2.47 | length 1691.7
  Top Layer w10: v1(1555,3675) 1555,3670.87 1574.5,3651.37 1574.5,3610.3 1695,3489.8 v1(1695,3420) ; v1(1885,2905) 1885,2890.87 1950.87,2825 2005,2825 2072.01,2757.99 U2.47
  Bottom Layer w10: J1.42 1379.38,3484.38 1379.38,3504.38 1414.5,3539.5 1414.5,3594.5 1445,3625 1520,3625 1550.98,3655.98 1550.98,3670.98 v1(1555,3675) ; v1(1695,3420) 1770,3345 1770,3198.13 1845,3123.13 1845,2945 v1(1885,2905)
PB13: J1.44 U2.48 | length 2082
  Top Layer w10: v1(1550,2885) 1690.07,2954 2046,2954 2048.93,2951.07 v1(2068.23,2931.77) ; v1(2035,2650) 2056.26,2628.74 U2.48
  Bottom Layer w10: J1.44 1362.57,3567.57 1362.57,3530.5 1325.5,3493.43 1325.5,3156.57 1357.07,3125 1382.93,3125 1422.75,3085.18 1422.75,3059.32 1455.69,3026.37 1481.56,3026.37 1550,2957.93 v1(1550,2885) ; v1(2035,2650) 2125,2740 2168.13,2740 2250.5,2822.37 2250.5,2909.5 2190.43,2969.57 2104.57,2969.57 2068.23,2933.23 v1(2068.23,2931.77)
PB14: J1.46 U2.50 | length 1663
  Top Layer w10: J1.46 1415.47,3629.53 1415.47,3572.38 1415.47,3570.03 ccw(c1536.49,3629.03) 1441.29,3533.83 ccw(c1492.27,3584.81) 1460.68,3520 1463.08,3520 1525,3520 1530.86,3514.14 1538.06,3502.17 1538.5,3501.45 1546.55,3480.9 1550.82,3470 1590,3470 1625,3435 1625,3335 1528.5,3238.5 1528.5,3172.98 1581.48,3120 1800,3120 1814.5,3105.5 v1(1814.5,3105) ; v1(1825,2890) 1825,2835 1869.5,2790.5 1869.5,2722.37 1936.87,2655 1940.09,2655 2024.76,2570.33 U2.50
  Bottom Layer w10: v1(1814.5,3105) 1814.5,3099.32 1825,3088.82 v1(1825,2890)
PB15: J1.48 U2.51 | length 1982
  Top Layer w10: J1.48 1377.43,3782.43 1414.5,3782.43 1459.57,3827.5 1545.93,3827.5 1605,3768.43 v1(1605,3635) ; v1(1969.15,2920) 1958.29,2920 1938.29,2940 1820,2940 1790,2910 1790,2845 1855.5,2779.5 1855.5,2716.57 1931.4,2640.67 1931.7,2640.67 2009.02,2563.35 U2.51
  Bottom Layer w10: v1(1605,3635) 1605,3560 1785,3380 1785,3245.23 1790.86,3239.38 1875.62,3239.38 1920,3195 1930.5,3184.5 1930.5,3147.37 1929.5,3146.37 1929.5,2959.65 v1(1969.15,2920)
PC0: J1.25 U2.64 | length 1255.4
  Top Layer w10: v1(1564.12,2160.88) 1565,2160 1565,2131.37 1656.37,2040 1800,2040 1855,2095 1855,2240 1935,2320 1935.51,2320 1940.45,2324.94 1941.91,2324.94 1948.98,2332.01 U2.64
  Bottom Layer w10: J1.25 1525,2620 1525,2464.8 1580,2409.8 1580,2176.36 1565,2161.36 1564.59,2161.36 v1(1564.12,2160.88)
PC1: J1.27 U2.65 | length 1063.6
  Top Layer w10: v1(1555,2670) 1556.36,2670 1571.36,2685 1730,2685 v1(1750,2665) ; v1(1885.5,2190) 1885,2190.5 1885,2200 1899,2214 1899,2263.69 1908.47,2273.15 1946.25,2310.94 1947.71,2310.94 1952.95,2316.18 1980.2,2316.18 U2.65
  Bottom Layer w10: J1.27 1470,2765 1550.98,2684.02 1550.98,2674.02 v1(1555,2670) ; v1(1750,2665) 1750,2575 1779,2546 1779,2352.37 1809,2322.37 1809,2266.5 v1(1885.5,2190)
PC2: J1.29 U2.66 | length 1504.8
  Top Layer w10: v1(1660.5,2009.5) 1660.5,2009.64 1666.36,2015.5 1795.3,2015.5 1916,2136.2 1916,2260.89 1932.52,2277.41 1952.05,2296.94 1953.51,2296.94 1957.01,2300.43 1980.2,2300.43 U2.66
  Bottom Layer w10: J1.29 1470,2865.23 1586,2749.23 1586,2601 1540,2555 1540,2475 1594.62,2420.38 1594.62,2148.25 1584,2137.63 1584,2086 1660,2010 v1(1660.5,2009.5)
PC3: J1.31 U2.67 | length 2287.5
  Top Layer w10: J1.31 1475,2980 1539.56,2988.91 1540.24,2989 1600.04,2990.62 1622.75,2995.92 1627,2996 2122.87,3004.99 2122.97,3005 2123.09,3005 2243.64,3005 2252.46,2996.18 2253.68,2996.18 v1@2253.75,2996.25 ; v1(1900,2030) 1930,2060 1930,2255.09 1946.52,2271.61 1957.85,2282.94 1959.31,2282.94 1961.06,2284.69 1980.2,2284.69 U2.67
  Bottom Layer w10: v1(1900,2030) 1904.02,2034.02 1919.02,2034.02 2095,2210 2095,2370 2260,2535 2260,2555.2 2355,2650.2 2355,2895 v1(2260,2990)
PC4: J1.33 U2.68 | length 1759.6
  Top Layer w10: J1.33 1525,3075 1581.48,3018.52 1589.77,3018.52 v1(1592.35,3021.12) ; v1(1860,1970.5) 1860.5,1970 1883.13,1970 1944,2030.87 1944,2247.83 1965.19,2269.02 U2.68
  Bottom Layer w10: v1(1592.35,3021.12) 1592.35,2974.98 1608.5,2958.83 1608.5,2860.77 1604.5,2856.77 1604.5,2790.13 1635,2759.63 1635,2739.8 1628.34,2733.14 1628.34,2396.66 1645,2380 1645,2086.87 1777.37,1954.5 1844,1954.5 v1(1860,1970.5)
PC5: J1.35 U2.1 | length 1463
  Top Layer w10: v1(1572.31,3172.31) 1572.31,3170.83 1588.13,3155 v1(1770,3155) ; v1(1975,2185) 1970.5,2185 1977.75,2192.25 1977.75,2195.39 2002.72,2220.36 U2.1@2008.94,2226.58
  Bottom Layer w10: J1.35 1475,3170 1570,3170 v1(1572.31,3172.31) ; v1(1770,3155) 1770,3029.8 1779,3020.8 1779,2762.21 1785,2756.21 1785,2565 1840,2510 1840,2260.2 1863.59,2236.61 1923.39,2236.61 v1(1975,2185)
PC6: J1.37 U2.58 | length 1730.5
  Top Layer w10: v1(1580,2515) 1610,2485 1610,2279.8 1691.8,2198 1748,2198 1765,2215 1765,2270 1921.5,2426.5 U2.58
  Bottom Layer w10: J1.37 1475,3270 1565.2,3270 1630,3205.2 1630,3170 1545,3085 1545,2982.73 1580.5,2947.23 1580.5,2872.37 1572.7,2864.56 1572.7,2782.33 1600,2755.03 1600,2552.18 1580,2532.18 v1(1580,2515)
PC7: J1.39 U2.59 | length 1843.5
  Top Layer w10: v1(1655,2900) 1613.43,2858.43 1602.07,2858.43 1520.14,2776.5 1520.14,2772.43 1525.12,2629.6 1525.18,2627.85 1525,2627.67 1525,2345 1686,2184 1764,2184 1779,2199 1779,2264.2 1925.55,2410.75 U2.59
  Bottom Layer w10: J1.39 1476.47,3368.53 1506.47,3368.53 1658,3217 1658,2903 v1(1655,2900)
PC8: J1.41 U2.60 | length 2235.7
  Top Layer w10: J1.41@1460,3475 1460,3465 1414.5,3419.5 1351.57,3419.5 1260.14,3328.07 1260.14,2621.93 1351.57,2530.5 1377.43,2530.5 1414.5,2493.43 1414.5,2456.57 1382.93,2425 1357.07,2425 1325.5,2393.43 1325.5,2356.57 1362.07,2320 1525,2320 1675,2170 1775,2170 1793,2188 1793,2258.4 1929.6,2395 U2.60
PC9: J1.43 U2.61 | length 2208.3
  Top Layer w10: v1(1614.5,2125) 1673.75,2125 1674.38,2124.38 1675.62,2124.38 1691,2109 1739,2109 1810,2180 1810,2255.6 1933.65,2379.25 U2.61
  Bottom Layer w10: J1.43 1470,3565 1415.5,3510.5 1415.5,3356.57 1441.57,3330.5 1524.5,3330.5 1644,3211 1644,3159 1560,3075 1560,2987.53 1594.5,2953.03 1594.5,2866.57 1586.7,2858.77 1586.7,2788.13 1614.34,2760.49 1614.34,2125.16 v1(1614.5,2125)
PC10: J1.45 U2.62 | length 2168.2
  Top Layer w10: J1.45 1479.38,3665.62 1499.38,3665.62 1582.75,3582.25 1582.75,3514.7 1574.5,3506.45 v1(1574.5,3500.77) ; v1(1795,2105) 1795,2125 1825,2155 1825,2249.6 1938.91,2363.5 U2.62
  Bottom Layer w10: v1(1574.5,3500.77) 1571.23,3497.5 1557.5,3497.5 1530,3470 1530,3385 1705,3210 1705,3075 1765,3015 1765,2875 1716,2826 1716,2589.2 1765,2540.2 1765,2346.57 1775,2336.57 1775,2125 v1(1795,2105)
PC11: J1.47 U2.63 | length 2434.2
  Top Layer w10: J1.47 1420,3725 1420,3650 1450.5,3619.5 1490.5,3619.5 1550,3560 v1(1550.62,3560) ; v1(1700,2075) 1705.68,2075 1715.68,2065 1798.13,2065 1840,2106.87 1840,2244.8 1942.96,2347.76 U2.63
  Bottom Layer w10: v1(1550.62,3560) 1550.62,3540.62 1515,3505 1515,3380 1672,3223 1672,2933 1690,2915 1690,2860 1700,2850 1700,2785 1642.34,2727.34 1642.34,2510.03 1676.87,2475.5 1677.63,2475.5 1695.5,2457.63 1695.5,2333 1679,2316.5 1679,2106.5 1700,2085.5 v1(1700,2075)
PD8: J1.4 U2.27 | length 2066.9
  Top Layer w10: U2.27 2439.25,2410.75 v1(2480,2370)
  Bottom Layer w10: J1.4@1360,1575 1360,1570 1405,1525 2260,1525 2455,1720 2455,2345 v1(2480,2370)
PD9: J1.6 U2.28 | length 2765.5
  Top Layer w10: J1.6@1367.43,1667.57 1404.5,1667.57 1442.07,1630 2260,1630 2495,1865 v2(2495,1866.57) ; U2.28 2461.5,2426.5 2503.09,2468.09 2503.09,2656.09 2520,2673 2662.66,2673 2690,2645.66 2690,2280 2635,2225 2565,2225 2525.78,2185.78 2521.61,2185.78 2510.82,2175 v2(2500,2175)
  Bottom Layer w10: v2(2495,1866.57) 2497.5,1869.07 2497.5,2162.5 v2@2495,2165
PD10: J1.8 U2.29 | length 1849.5
  Top Layer w10: J1.8@1367.43,1782.43 1404.5,1782.43 1439.57,1817.5 1456.81,1817.5 cw(c1470,1775) 1478.77,1818.63 1552.37,1804 1601.91,1799.5 1859.5,1799.5 1930,1870 v1(1930,1925) ; U2.29 2457.24,2442.24 2485,2470 2485,2545 2465,2565 v1(2440,2565)
  Bottom Layer w10: v1(1930,1925) 1930,1940 2414,2424 2414,2539 v1(2440,2565)
PD11: J1.10 U2.30 | length 1623.6
  Top Layer w10: U2.30 2382.99,2457.99 2425,2500 v1(2445,2500)
  Bottom Layer w10: J1.10 1383.26,1875 1396.58,1888.32 1399.61,1888.32 1422.94,1911.65 ; 1422.94,1911.68 1424.05,1912.79 1439.73,1928.47 1492.66,1928.47 1550.13,1871 1842.63,1871 1848.63,1865 1920,1865 2445,2390 v1(2445,2500)
PD12: J1.12 U2.31 | length 1883.5
  Top Layer w10: J1.12 1414.5,2019.5 1565.5,2019.5 1660,1925 v1(1660,1924.5) ; U2.31 2338.74,2473.74 2366.86,2501.86 2366.86,2541.86 2460,2635 v1(2460,2670)
  Bottom Layer w10: v1(1660,1924.5) 1676,1940.5 1842.63,1940.5 1843.13,1940 1873.13,1940 2110,2176.87 2110,2365.2 2274,2529.2 2274,2549.4 2369,2644.4 2369,2659 2380,2670 v1(2460,2670)
PD13: J1.14 U2.32 | length 1751
  Top Layer w10: J1.14 1377.43,2082.43 1414.5,2082.43 1451.57,2119.5 1485.5,2119.5 1490.51,2114.49 cw(c1470,2075) 1509.49,2095.51 1650,1955 1770,1955 1810.98,1914.02 1820.98,1914.02 v1(1825,1910) ; U2.32 2328.19,2489.49 2352.86,2514.15 2352.86,2582.86 v1(2400,2630)
  Bottom Layer w10: v1(1825,1910) 1830,1915 1870,1915 2400,2445 v1(2400,2630)
PD14: J1.16 U2.33 | length 3786.6
  Top Layer w10: U2.33 2324.14,2505.24 2330,2511.09 2330,2665 2375,2710 2667.15,2710 2710,2667.15 2710,1905 2290,1485 v1(2290,1430)
  Bottom Layer w10: J1.16 1360.62,2165.62 1360.62,2145.62 1310,2095 1310,1472.07 1397.07,1385 2245,1385 v1(2290,1430)
PD15: J1.18 U2.34 | length 1616.7
  Top Layer w10: J1.18 1415.47,2229.53 1478.4,2229.53 1530,2177.93 1530,2096.87 1652.37,1974.5 1789.5,1974.5 1800,1985 v1(1807.47,1985) ; U2.34 2294.92,2520.98 2295,2521.06 v1@2295,2635.59
  Bottom Layer w10: v1(1807.47,1985) 1853.59,2031.12 1903.16,2080.69 1940.69,2080.69 2075,2215 2075,2390 2300,2615 2300,2623.64 2299.02,2624.62 2299.02,2635.98 v1(2295,2640)
PF0: J1.3 U2.2 | length 1115.6
  Top Layer w10: J1.3 1472.75,1577.75 1567.25,1577.75 v1(1570,1580.5) ; v1(1550.93,1709.5) 1552.37,1709.5 1554.95,1706.92 1565.38,1706.92 1567.29,1705 1795,1705 1970.5,1880.5 1970.5,2127.37 2024.69,2181.55 2024.69,2240.2 U2.2
  Bottom Layer w10: v1(1550.93,1709.5) 1550.93,1704.5 1570,1685.43 v1(1570,1580.5)
PF1: J1.5 U2.3 | length 996.1
  Top Layer w10: J1.5@1460,1675 1785,1675 1985,1875 1985,2122.07 2040.51,2177.58 U2.3
PF2: J1.7 U2.4 | length 1022.2
  Top Layer w10: J1.7 1763.64,1775 1778.64,1760 v1(1780,1760) ; v1(1975,1765) 2000,1790 2000,2117.27 2056.26,2173.53 U2.4
  Bottom Layer w10: v1(1780,1760) 1785,1765 v1(1975,1765)
PF3: J1.9 U2.5 | length 1167.9
  Top Layer w10: J1.9 1475,1880 1535,1880 1565,1850 v1(1565,1834.5) ; v1(2019.5,1735) 2024.14,1735 2030,1740.86 2030,1795 2014.5,1810.5 2014.5,2111.97 2072.01,2169.48 U2.5
  Bottom Layer w10: v1(1565,1834.5) 1597.37,1834.5 1702.37,1729.5 2014,1729.5 v1(2019.5,1735)
PF4: J1.11 U2.10 | length 1139.4
  Top Layer w10: J1.11 1483.26,1975 1498.26,1990 1541.27,1990 1579.57,1951.7 1579.57,1950.43 1700,1830 v1(1750,1830) ; v1(2105,1855) 2130.5,1880.5 2130.5,2130.5 2150,2150 2150,2222.87 2150.67,2223.53 2150.67,2240.2 U2.10
  Bottom Layer w10: v1(1750,1830) 1751.36,1830 1771.36,1810 2060,1810 v1(2105,1855)
PF5: J1.13 U2.11 | length 1724.8
  Top Layer w10: J1.13 J1.13@1475,2070 ; v1(2115.31,1705.16) 2115.31,1705.31 2145.5,1735.5 2145.5,2119.5 2166.5,2140.5 U2.11
  Bottom Layer w10: J1.13 1462.57,2067.57 1462.57,2030.5 1435,2002.93 1435,2002.48 ccw(c1470,1975) 1431.94,1951.94 1399.5,1919.5 1351.57,1919.5 1338.54,1906.48 ccw(c1370,1875) 1338.53,1843.53 1351.57,1830.5 1477.43,1830.5 1503.93,1804 1606,1804 1705.5,1704.5 2032.13,1704.5 2037.34,1709.7 2096.21,1709.7 2096.73,1709.18 2111.29,1709.18 v1(2115.31,1705.16)
PF6: J1.15 U2.12 | length 2655.9
  Top Layer w10: J1.15 1415,2120 1340.86,2120 1239,2018.14 1239,1543.07 1367.07,1415 1761.63,1415 1762.63,1416 2162.87,1416 v1(2165.93,1419.07) ; v1(2115,1469.5) 2115,1535 v1@2175,1595 ; v1@2165.93,1415 v1@2170,1415 ; v1(2180,1685) 2178.43,1686.57 2178.43,1706.57 2160,1725 2160,2105 2182.24,2127.24 U2.12
  Bottom Layer w10: v1(2115,1469.5) 2115.25,1469.5 2165.68,1419.07 v1(2165.93,1419.07) ; v1(2170,1585) 2170,1590.68 2180,1600.68 v1(2180,1685)
PF7: J1.17 U2.13 | length 1615.3
  Top Layer w10: v1(1549.07,1939.07) 1553.08,1935.05 1553.08,1921.92 v1(1640.5,1834.5) ; U2.13 2198.07,2240.2 2198.07,2223.53 2199.74,2221.87 2199.74,2150.46 2215,2135.2 2215,2073.9 2214.44,2073.34 2214.44,2061.74 2215,2061.19 2215,1953.36 2217.81,1950.55 2217.81,1927.19 2270,1875 v1(2270,1825)
  Bottom Layer w10: J1.17 1470,2266.87 1528.5,2208.37 1528.5,1961.92 1549.07,1941.36 v1(1549.07,1939.07) ; v1(1640.5,1834.5) 1641.36,1835.36 1649.64,1835.36 1689.5,1795.5 2235.5,1795.5 2265,1825 v1(2270,1825)
PF8: J1.19 U2.6 | length 1473.5